# EAGLE board ec3-ps2-100cm2 (EAGLE 7.5.0)
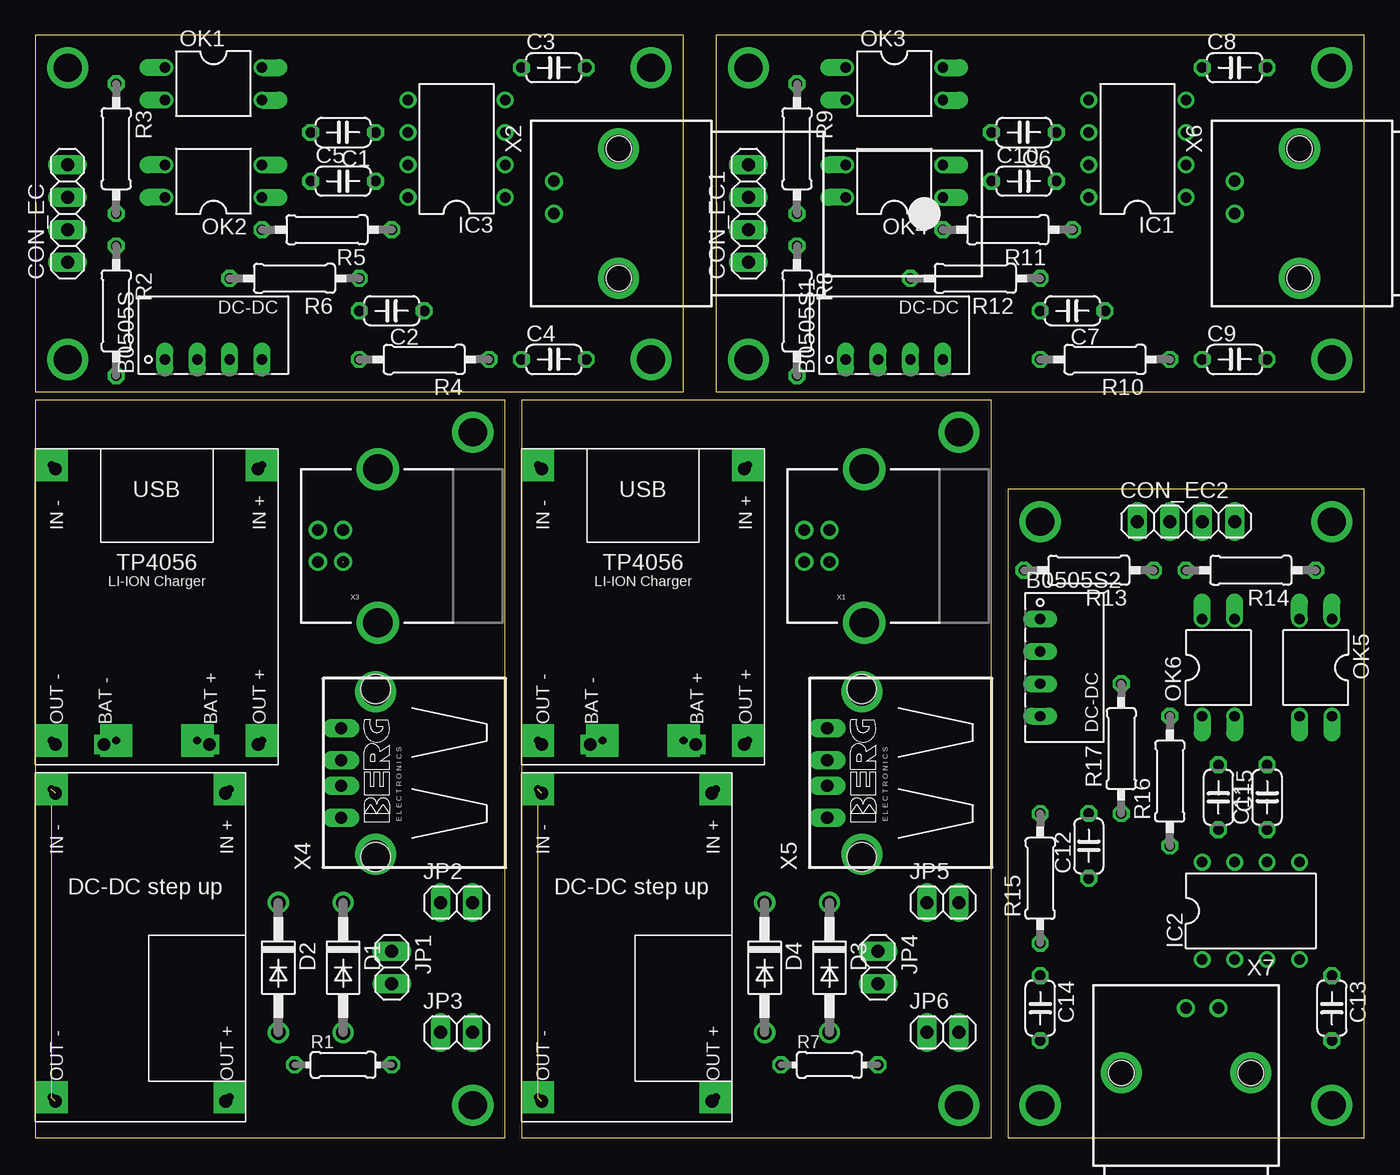
[diagram p0: board, top side]
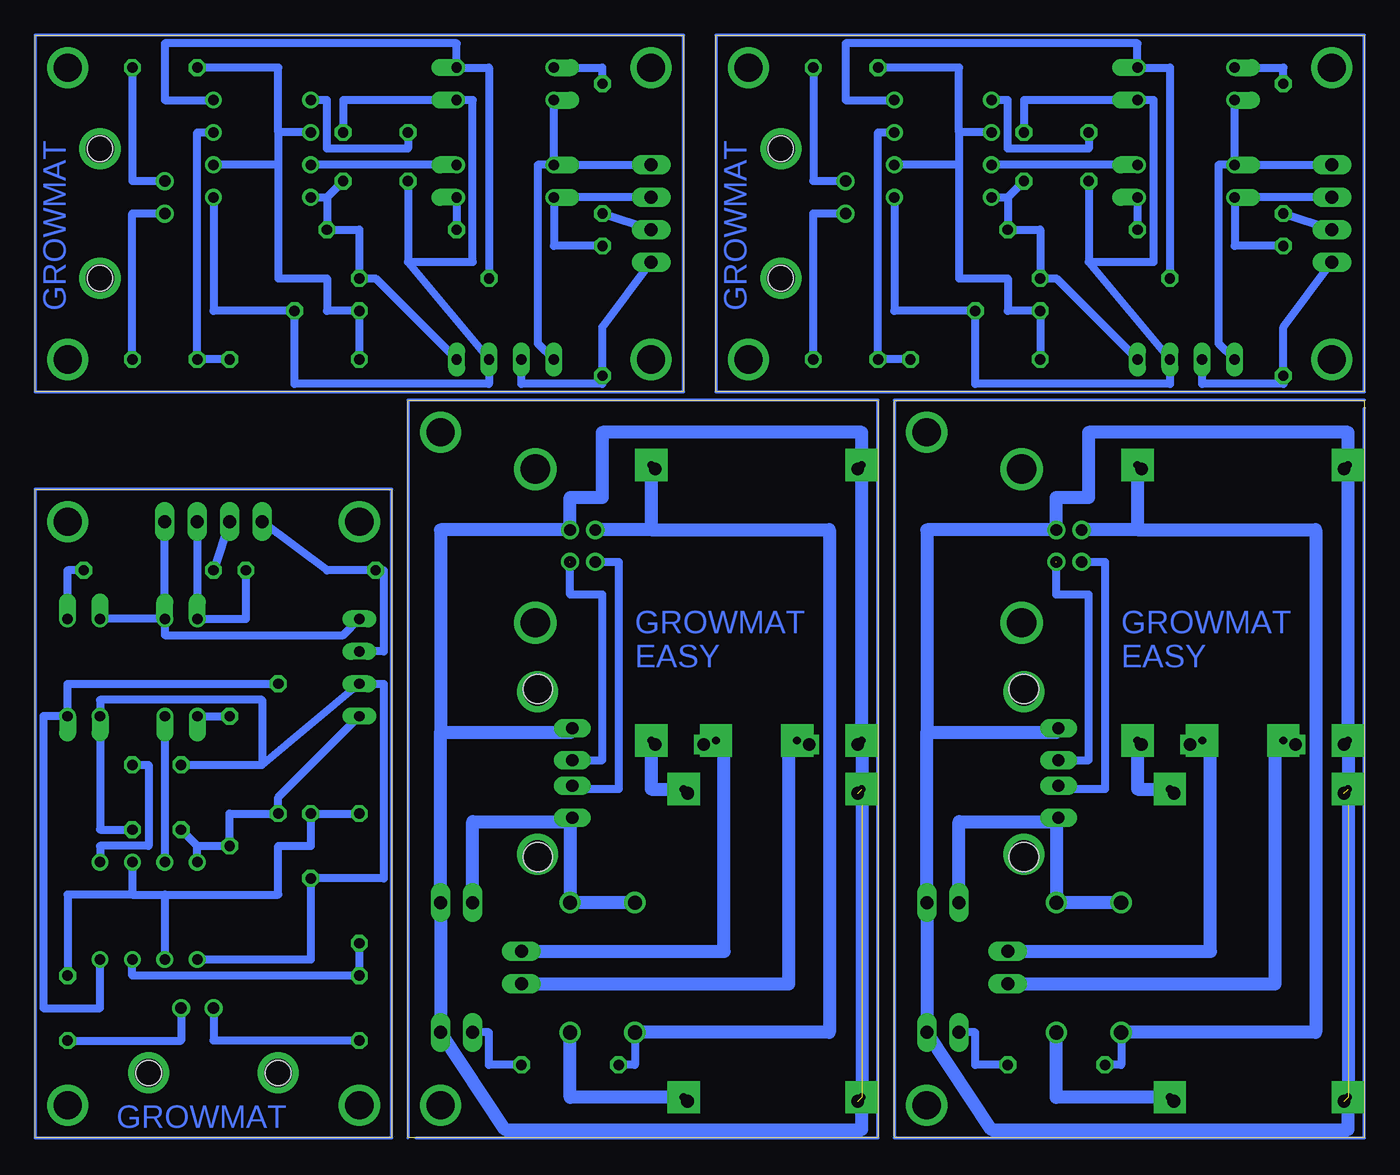
[diagram p1: board, bottom side, seen from below]

Size 104.14 x 86.36 mm. Coordinates in mm from the lower left corner, seen from the top.
Outline: 0,0 36.83,0 36.83,57.77 0,57.77 0,0
Outline: 50.8,58.42 50.8,86.36 0.01,86.36 0.01,58.42 50.8,58.42
Outline: 38.1,0 74.93,0 74.93,57.77 38.1,57.77 38.1,0
Outline: 104.14,58.42 104.14,86.36 53.35,86.36 53.35,58.42 104.14,58.42
Outline: 76.2,0 104.14,0 104.14,50.79 76.2,50.79 76.2,0
Copper layers (1*16): Top 0.035mm / dielectric 1.5mm / Bottom 0.035mm
Design rules "default": minimum track width 10mil, minimum drill 24mil, track to track 8mil, track to pad 8mil, pad to pad 8mil, via to via 8mil, smd to smd 8mil, copper to edge 40mil, drill to drill 8mil, minimum pad ring 10mil, minimum via ring 8mil, stop-mask expansion 4mil, vias tented up to drill 0mil, thermal gap 10mil

## Footprints (pad centres in the part's own frame; a part is rotated, then mirrored left to right if it is on the bottom)
NME = drill 0.813 long: 1 0,3.81; 2 0,1.27; 3 0,-1.27; 4 0,-3.81
C050-024X044 = drill 0.813 octagon: 1 -2.54,0; 2 2.54,0
1X04 = drill 1.016 long: 1 -3.81,0; 2 -1.27,0; 3 1.27,0; 4 3.81,0
DO41-10 = drill 1.118: A 5.08,0; C -5.08,0
DIL08 = drill 0.813 pad 1.27: 1 -3.81,-3.81; 2 -1.27,-3.81; 3 1.27,-3.81; 4 3.81,-3.81; 5 3.81,3.81; 6 1.27,3.81; 7 -1.27,3.81; 8 -3.81,3.81
1X02 = drill 1.016 long: 1 -1.27,0; 2 1.27,0
DIL04 = drill 0.813 offset: 1 -1.27,-3.81; 2 1.27,-3.81; 3 1.27,3.81; 4 -1.27,3.81
0204/7 = drill 0.813 octagon: 1 -3.81,0; 2 3.81,0
0207/10 = drill 0.813 octagon: 1 -5.08,0; 2 5.08,0
TP4056 = drill 1 pad 1.422 square: BAT+ 4.763,-10.477; BAT- -3.493,-10.477; IN+ 8.565,11.105; IN- -7.295,11.105; OUT+ 8.572,-10.477; OUT- -7.303,-10.477
DC-DC_STEPUP = drill 1 pad 1.422 square: IN+ 6.025,11.105; IN- -7.295,11.105; OUT+ 6.032,-13.018; OUT- -7.303,-13.018
USB-B-PTH = drill 0.914: D+ 0,1.25; D- 1.981,1.25; GND 0,-1.25; VBUS 1.981,-1.25 | drill 2.286: P$1 -2.718,-6.02; P$2 -2.718,6.02
AMP_227161 = drill 0.9 pad 1.27: 1 0,-5.08; 2 -2.54,-5.08 | hole 2: -5.08,0; 5.08,0
PN87520 = drill 0.95 long: 1 -3.5,2.71; 2 -1,2.71; 3 1,2.71; 4 3.5,2.71 | hole 2.3: -6.57,0; 6.57,0

## Placement (x,y rotation side)
B0505S  [NME]  13.97,60.96 90 top
B0505S1  [NME]  67.31,60.96 90 top
B0505S2  [NME]  78.74,36.83 0 top
C1  0,1uF  [C050-024X044]  24.13,78.74 180 top
C2  0,1uF  [C050-024X044]  27.94,64.77 180 top
C3  1uF  [C050-024X044]  40.64,83.82 0 top
C4  1uF  [C050-024X044]  40.64,60.96 0 top
C5  0,1uF  [C050-024X044]  24.13,74.93 0 top
C6  0,1uF  [C050-024X044]  77.47,78.74 180 top
C7  0,1uF  [C050-024X044]  81.28,64.77 180 top
C8  1uF  [C050-024X044]  93.98,83.82 0 top
C9  1uF  [C050-024X044]  93.98,60.96 0 top
C10  0,1uF  [C050-024X044]  77.47,74.93 0 top
C11  0,1uF  [C050-024X044]  96.52,26.67 90 top
C12  0,1uF  [C050-024X044]  82.55,22.86 90 top
C13  1uF  [C050-024X044]  101.6,10.16 270 top
C14  1uF  [C050-024X044]  78.74,10.16 270 top
C15  0,1uF  [C050-024X044]  92.71,26.67 270 top
CON_EC  [1X04]  2.54,72.39 90 top
CON_EC1  [1X04]  55.88,72.39 90 top
CON_EC2  [1X04]  90.17,48.26 0 top
D1  1N4004  [DO41-10]  24.13,13.34 270 top
D2  1N4004  [DO41-10]  19.05,13.34 270 top
D3  1N4004  [DO41-10]  62.23,13.34 270 top
D4  1N4004  [DO41-10]  57.15,13.34 270 top
IC1  LM555N  [DIL08]  86.36,77.47 90 top
IC2  LM555N  [DIL08]  95.25,17.78 0 top
IC3  LM555N  [DIL08]  33.02,77.47 90 top
JP1  [1X02]  27.94,13.34 270 top
JP2  [1X02]  33.02,18.41 0 top
JP3  [1X02]  33.02,8.25 0 top
JP4  [1X02]  66.04,13.34 270 top
JP5  [1X02]  71.12,18.41 0 top
JP6  [1X02]  71.12,8.25 0 top
OK1  LTV816  [DIL04]  13.97,82.55 270 top
OK2  LTV816  [DIL04]  13.97,74.93 90 top
OK3  LTV816  [DIL04]  67.31,82.55 270 top
OK4  LTV816  [DIL04]  67.31,74.93 90 top
OK5  LTV816  [DIL04]  100.33,36.83 180 top
OK6  LTV816  [DIL04]  92.71,36.83 0 top
R1  [0204/7]  24.13,5.71 0 top
R2  10k  [0207/10]  6.35,64.77 270 top
R3  1k  [0207/10]  6.35,77.47 270 top
R4  10k  [0207/10]  30.48,60.96 180 top
R5  1k  [0207/10]  22.86,71.12 180 top
R6  10k  [0207/10]  20.32,67.31 180 top
R7  [0204/7]  62.23,5.71 0 top
R8  10k  [0207/10]  59.69,64.77 270 top
R9  1k  [0207/10]  59.69,77.47 270 top
R10  10k  [0207/10]  83.82,60.96 180 top
R11  1k  [0207/10]  76.2,71.12 180 top
R12  10k  [0207/10]  73.66,67.31 180 top
R13  10k  [0207/10]  82.55,44.45 180 top
R14  1k  [0207/10]  95.25,44.45 180 top
R15  10k  [0207/10]  78.74,20.32 90 top
R16  1k  [0207/10]  88.9,27.94 90 top
R17  10k  [0207/10]  85.09,30.48 90 top
U$1  TP4056  [TP4056]  8.89,41.27 0 top
U$2  DC-DC_STEPUP  [DC-DC_STEPUP]  8.89,15.88 0 top
U$3  TP4056  [TP4056]  46.99,41.27 0 top
U$4  DC-DC_STEPUP  [DC-DC_STEPUP]  46.99,15.88 0 top
X1  USBPTH  [USB-B-PTH]  62.23,46.35 180 top
X2  1-227161-0  [AMP_227161]  45.72,72.39 270 top
X3  USBPTH  [USB-B-PTH]  24.13,46.35 180 top
X4  [PN87520]  26.67,28.57 90 top
X5  [PN87520]  64.77,28.57 90 top
X6  1-227161-0  [AMP_227161]  99.06,72.39 270 top
X7  1-227161-0  [AMP_227161]  90.17,5.08 180 top

## Library data of the parts
B0505S B0505S1 B0505S2 = dc-dc-converter; MF: C & D TECHNOLOGIES, INC; MPN: NME1205D; OC_FARNELL: 1021466; OC_NEWARK: 98B8198
C1-C15 = rcl
CON_EC CON_EC1 CON_EC2 JP1-JP6 = pinhead
D1-D4 = diode
IC1-IC3 = linear
OK1-OK6 = optocoupler; OC_FARNELL: unknown; OC_NEWARK: unknown
R1 R7 = resistor
R2-R6 R8-R17 = eagle-ltspice; SPICEMODEL: NONE; SPICEPREFIX: R
U$1 U$3 = TP4056 charging module with protection
U$2 U$4 = DC-DC step up
X1 X3 = usb
X2 X6 X7 = con-coax; MF: TYCO ELECTRONICS; MPN: 1-227161; OC_FARNELL: unknown; OC_NEWARK: 33B3200
X4 X5 = con-berg; OC_FARNELL: unknown; OC_NEWARK: unknown

## Nets
5V: B0505S.2 CON_EC.1 R2.2
5V1: B0505S1.2 CON_EC1.1 R8.2
5V2: B0505S2.2 CON_EC2.1 R13.2
EC: CON_EC.3 OK2.4 R2.1
EC1: CON_EC1.3 OK4.4 R8.1
EC2: CON_EC2.3 OK6.4 R13.1
EC_5V: B0505S.4 C5.2 IC3.8 R5.1 R6.1
EC_5V1: B0505S1.4 C10.2 IC1.8 R11.1 R12.1
EC_5V2: B0505S2.4 C15.2 IC2.8 R16.1 R17.1
EC_EANBLE: CON_EC.2 R3.2
EC_EANBLE1: CON_EC1.2 R9.2
EC_EANBLE2: CON_EC2.2 R14.2
EC_EC: IC3.7 OK2.2
EC_EC1: IC1.7 OK4.2
EC_EC2: IC2.7 OK6.2
EC_EC_ENABLE: IC3.4 OK1.4 R6.2
EC_EC_ENABLE1: IC1.4 OK3.4 R12.2
EC_EC_ENABLE2: IC2.4 OK5.4 R17.2
EC_GND: B0505S.3 C1.1 C2.1 C5.1 IC3.1 OK1.3
EC_GND1: B0505S1.3 C6.1 C7.1 C10.1 IC1.1 OK3.3
EC_GND2: B0505S2.3 C11.1 C12.1 C15.1 IC2.1 OK5.3
GND: B0505S.1 CON_EC.4 OK1.2 OK2.3
GND1: B0505S1.1 CON_EC1.4 OK3.2 OK4.3
GND2: B0505S2.1 CON_EC2.4 OK5.2 OK6.3
N$1: D2.A R1.1 U$1.IN+ X3.VBUS
N$2: U$1.OUT+ U$2.IN+
N$3: JP2.2 JP3.2 U$1.IN- U$1.OUT- U$2.IN- U$2.OUT- X3.GND X4.4
N$6: JP1.1 U$1.BAT+
N$7: JP1.2 U$1.BAT-
N$8: D1.A U$2.OUT+
N$9: D1.C D2.C JP2.1 X4.1
N$10: C1.2 IC3.5
N$11: D4.A R7.1 U$3.IN+ X1.VBUS
N$12: JP3.1 R1.2
N$13: X3.D+ X4.3
N$14: X3.D- X4.2
N$15: U$3.OUT+ U$4.IN+
N$16: JP4.1 U$3.BAT+
N$17: JP4.2 U$3.BAT-
N$18: D3.A U$4.OUT+
N$19: D3.C D4.C JP5.1 X5.1
N$20: JP6.1 R7.2
N$21: X1.D+ X5.3
N$22: X1.D- X5.2
N$23: JP5.2 JP6.2 U$3.IN- U$3.OUT- U$4.IN- U$4.OUT- X1.GND X5.4
N$26: OK3.1 R9.1
N$27: C6.2 IC1.5
N$28: C7.2 C8.1 IC1.2 IC1.6 R10.2
N$29: C3.2 X2.2
N$30: C2.2 C3.1 IC3.2 IC3.6 R4.2
N$31: OK1.1 R3.1
N$32: C4.1 IC3.3 R4.1
N$33: OK2.1 R5.2
N$34: C4.2 X2.1
N$35: C9.1 IC1.3 R10.1
N$36: OK4.1 R11.2
N$37: C8.2 X6.2
N$38: C9.2 X6.1
N$39: OK5.1 R14.1
N$40: C11.2 IC2.5
N$41: C12.2 C13.1 IC2.2 IC2.6 R15.2
N$42: C14.1 IC2.3 R15.1
N$43: OK6.1 R16.2
N$44: C13.2 X7.2
N$45: C14.2 X7.1

## Tracks (layer width: path | path; a pad name or v marks a point on that pad's centre or on a via)
5V
  Bottom 0.61: B0505S.2 12.7,59.05 6.35,59.05 R2.2 6.35,63.5 CON_EC.1
5V1
  Bottom 0.61: B0505S1.2 66.04,59.05 59.69,59.05 R8.2 59.69,63.5 CON_EC1.1
5V2
  Bottom 0.61: B0505S2.2 76.83,38.1 76.83,44.45 R13.2 81.28,44.45 CON_EC2.1
EC
  Bottom 0.61: R2.1 10.16,69.85 OK2.4 CON_EC.3
EC1
  Bottom 0.61: R8.1 63.5,69.85 OK4.4 CON_EC1.3
EC2
  Bottom 0.61: R13.1 87.63,40.64 OK6.4 CON_EC2.3
EC_5V
  Bottom 0.61: 27.94,73.66 R5.1 25.4,71.12 R6.1 24.13,67.31 B0505S.4 | IC3.8 27.94,73.66 | 27.94,73.66 C5.2
EC_5V1
  Bottom 0.61: 81.28,73.66 R11.1 78.74,71.12 R12.1 77.47,67.31 B0505S1.4 | IC1.8 81.28,73.66 | 81.28,73.66 C10.2
EC_5V2
  Bottom 0.61: 91.44,22.86 R16.1 88.9,25.4 R17.1 85.09,26.67 B0505S2.4 | IC2.8 91.44,22.86 | 91.44,22.86 C15.2
EC_EANBLE
  Bottom 0.61: CON_EC.2 R3.2
EC_EANBLE1
  Bottom 0.61: CON_EC1.2 R9.2
EC_EANBLE2
  Bottom 0.61: CON_EC2.2 R14.2
EC_EC
  Bottom 0.61: OK2.2 IC3.7
EC_EC1
  Bottom 0.61: OK4.2 IC1.7
EC_EC2
  Bottom 0.61: OK6.2 IC2.7
EC_EC_ENABLE
  Bottom 0.61: R6.2 15.24,83.82 OK1.4 17.78,85.73 40.64,85.73 40.64,81.28 IC3.4
EC_EC_ENABLE1
  Bottom 0.61: R12.2 68.58,83.82 OK3.4 71.12,85.73 93.98,85.73 93.98,81.28 IC1.4
EC_EC_ENABLE2
  Bottom 0.61: R17.2 101.6,35.56 OK5.4 103.5,33.02 103.5,10.16 99.06,10.16 IC2.4
EC_GND
  Bottom 0.61: C1.1 26.67,81.28 OK1.3 16.51,81.28 16.51,68.58 21.59,68.58 | 21.59,68.58 B0505S.3 15.24,59.05 30.48,59.05 C2.1 36.83,64.77 IC3.1 | C5.1 21.59,68.58
EC_GND1
  Bottom 0.61: C6.1 80.01,81.28 OK3.3 69.85,81.28 69.85,68.58 74.93,68.58 | 74.93,68.58 B0505S1.3 68.58,59.05 83.82,59.05 C7.1 90.17,64.77 IC1.1 | C10.1 74.93,68.58
EC_GND2
  Bottom 0.61: C11.1 99.06,24.13 OK5.3 99.06,34.29 86.36,34.29 86.36,29.21 | 86.36,29.21 B0505S2.3 76.83,35.56 76.83,20.32 C12.1 82.55,13.97 IC2.1 | C15.1 86.36,29.21
GND
  Bottom 0.61: B0505S.1 11.43,62.23 11.43,76.2 OK2.3 | OK2.3 OK1.2 | OK2.3 CON_EC.4
GND1
  Bottom 0.61: B0505S1.1 64.77,62.23 64.77,76.2 OK4.3 | OK4.3 OK3.2 | OK4.3 CON_EC1.4
GND2
  Bottom 0.61: B0505S2.1 80.01,39.37 93.98,39.37 OK6.3 | OK6.3 OK5.2 | OK6.3 CON_EC2.4
N$1
  Bottom 0.254: 21.59,47.62 X3.VBUS | 17.78,47.62 U$1.IN+
  Bottom 0.61: D2.A 19.05,5.71 R1.1
  Bottom 1.016: 17.78,47.62 3.81,47.62 3.81,8.25 D2.A | 17.78,52.07 17.78,47.62 | 17.78,47.62 21.59,47.62
N$2
  Bottom 0.254: 15.24,27.3 U$2.IN+ | 17.78,30.48 U$1.OUT+
  Bottom 1.016: 15.24,27.3 17.78,27.3 17.78,30.48
N$3  (2 unrouted)
  Bottom 0.254: 1.27,26.67 U$2.IN- | 1.27,31.11 U$1.OUT- | 1.27,52.7 U$1.IN- | 24.13,31.75 X4.4
  Bottom 1.016: 34.29,31.75 24.13,31.75 | 34.29,31.75 34.29,47.6 X3.GND 24.13,50.16 21.59,50.16 21.59,55.24 1.27,55.24 1.27,52.7 1.27,31.11 | U$1.OUT- 1.27,30.8 1.27,27.3 | 1.27,3.17 1.27,0.64 29.21,0.64 JP3.2 JP2.2 34.29,31.75
  Bottom 1.27: 1.27,26.67 1.59,26.67
N$4  (via drill 0.6 pad 2.54)  (1 unrouted)
  Bottom 1.016: v1.27,27.3 v1.27,3.17
  other vias: 15.24,3.17 1.27,31.11 6.35,31.11 17.78,31.11 12.7,31.11 15.24,27.3 17.78,52.7 1.27,52.7
N$5  (via drill 2.2)
  other vias: 34.29,55.24 34.29,2.54 26.67,34.92 26.67,22.22
N$6
  Bottom 0.254: 12.06,30.48 U$1.BAT+
  Bottom 1.016: 12.06,30.48 12.06,14.61 JP1.1
N$7
  Bottom 0.254: 6.98,30.48 U$1.BAT-
  Bottom 1.016: 6.98,30.48 6.98,12.07 JP1.2
N$8
  Bottom 0.254: 15.24,3.17 U$2.OUT+
  Bottom 1.016: 15.24,3.17 24.13,3.17 D1.A
N$9
  Bottom 1.016: D2.C D1.C 24.13,25.07 X4.1 23.96,24.77 31.75,24.77 JP2.1
N$10
  Bottom 0.61: IC3.5 27.94,81.28 27.94,77.47 21.59,77.47 C1.2
N$11
  Bottom 0.254: 59.69,47.62 X1.VBUS | 55.88,47.62 U$3.IN+
  Bottom 0.61: D4.A 57.15,5.71 R7.1
  Bottom 1.016: 55.88,47.62 41.91,47.62 41.91,8.25 D4.A | 55.88,52.07 55.88,47.62 | 55.88,47.62 59.69,47.62
N$12
  Bottom 0.61: R1.2 30.48,5.71 30.48,8.25 JP3.1
N$13  (1 unrouted)
  Bottom 0.61: X4.3 21.59,29.57 21.59,42.55 24.13,42.55 24.13,45.09
N$14
  Bottom 0.61: X3.D- 20.32,45.1 20.32,27.3 23.96,27.3 X4.2
N$15
  Bottom 0.254: 53.34,27.3 U$4.IN+ | 55.88,30.48 U$3.OUT+
  Bottom 1.016: 53.34,27.3 55.88,27.3 55.88,30.48
N$16
  Bottom 0.254: 50.17,30.48 U$3.BAT+
  Bottom 1.016: 50.17,30.48 50.17,14.61 JP4.1
N$17
  Bottom 0.254: 45.09,30.48 U$3.BAT-
  Bottom 1.016: 45.09,30.48 45.09,12.07 JP4.2
N$18
  Bottom 0.254: 53.34,3.17 U$4.OUT+
  Bottom 1.016: 53.34,3.17 62.23,3.17 D3.A
N$19
  Bottom 1.016: D4.C D3.C 62.23,25.07 X5.1 62.06,24.77 69.85,24.77 JP5.1
N$20
  Bottom 0.61: R7.2 68.58,5.71 68.58,8.25 JP6.1
N$21  (1 unrouted)
  Bottom 0.61: X5.3 59.69,29.57 59.69,42.55 62.23,42.55 62.23,45.09
N$22
  Bottom 0.61: X1.D- 58.42,45.1 58.42,27.3 62.06,27.3 X5.2
N$23  (2 unrouted)
  Bottom 0.254: 39.37,26.67 U$4.IN- | 39.37,31.11 U$3.OUT- | 39.37,52.7 U$3.IN- | 62.23,31.75 X5.4
  Bottom 1.016: 72.39,31.75 62.23,31.75 | 72.39,31.75 72.39,47.6 X1.GND 62.23,50.16 59.69,50.16 59.69,55.24 39.37,55.24 39.37,52.7 39.37,31.11 | U$3.OUT- 39.37,30.8 39.37,27.3 | 39.37,3.17 39.37,0.64 67.31,0.64 JP6.2 JP5.2 72.39,31.75
  Bottom 1.27: 39.37,26.67 39.69,26.67
N$24  (via drill 0.6 pad 2.54)  (1 unrouted)
  Bottom 1.016: v39.37,27.3 v39.37,3.17
  other vias: 53.34,3.17 39.37,31.11 44.45,31.11 55.88,31.11 50.8,31.11 53.34,27.3 55.88,52.7 39.37,52.7
N$25  (via drill 2.2)
  other vias: 72.39,55.24 72.39,2.54 64.77,34.92 64.77,22.22
N$26
  Bottom 0.61: OK3.1 59.69,83.82 R9.1
N$27
  Bottom 0.61: IC1.5 81.28,81.28 81.28,77.47 74.93,77.47 C6.2
N$28
  Bottom 0.61: R10.2 C7.2 81.28,64.77 81.28,67.31 85.09,67.31 85.09,76.2 | 85.09,76.2 IC1.2 | IC1.6 85.09,78.74 | C8.1 85.09,83.82 85.09,78.74 | 85.09,78.74 85.09,76.2
N$29
  Bottom 0.61: X2.2 43.18,74.93 C3.2
N$30
  Bottom 0.61: R4.2 C2.2 27.94,64.77 27.94,67.31 31.75,67.31 31.75,76.2 | 31.75,76.2 IC3.2 | IC3.6 31.75,78.74 | C3.1 31.75,83.82 31.75,78.74 | 31.75,78.74 31.75,76.2
N$31
  Bottom 0.61: OK1.1 6.35,83.82 R3.1
N$32
  Bottom 0.61: R4.1 C4.1 38.1,78.74 IC3.3
N$33
  Bottom 0.61: OK2.1 R5.2
N$34
  Bottom 0.61: X2.1 43.18,72.39 C4.2
N$35
  Bottom 0.61: R10.1 C9.1 91.44,78.74 IC1.3
N$36
  Bottom 0.61: OK4.1 R11.2
N$37
  Bottom 0.61: X6.2 96.52,74.93 C8.2
N$38
  Bottom 0.61: X6.1 96.52,72.39 C9.2
N$39
  Bottom 0.61: OK5.1 101.6,44.45 R14.1
N$40
  Bottom 0.61: IC2.5 99.06,22.86 95.25,22.86 95.25,29.21 C11.2
N$41
  Bottom 0.61: R15.2 C12.2 82.55,22.86 85.09,22.86 85.09,19.05 93.98,19.05 | 93.98,19.05 IC2.2 | IC2.6 96.52,19.05 | C13.1 101.6,19.05 96.52,19.05 | 96.52,19.05 93.98,19.05
N$42
  Bottom 0.61: R15.1 C14.1 96.52,12.7 IC2.3
N$43
  Bottom 0.61: OK6.1 R16.2
N$44
  Bottom 0.61: X7.2 92.71,7.62 C13.2
N$45
  Bottom 0.61: X7.1 90.17,7.62 C14.2
S$1  (via drill 2.2)
  other vias: 48.26,83.82 48.26,60.96 2.54,60.96 2.54,83.82 45.72,77.47 45.72,67.31
S$2  (via drill 2.2)
  other vias: 101.6,83.82 101.6,60.96 55.88,60.96 55.88,83.82 99.06,77.47 99.06,67.31
S$3  (via drill 2.2)
  other vias: 101.6,2.54 78.74,2.54 78.74,48.26 101.6,48.26 95.25,5.08 85.09,5.08
S$4
  Bottom 0.254: 0,86.36 50.8,86.36 50.8,58.42 0,58.42 0,86.36
S$5
  Bottom 0.254: 0,57.78 36.83,57.78 36.83,0 0,0 0,57.15
S$6
  Bottom 0.254: 76.2,50.8 104.14,50.8 104.14,0 76.2,0 76.2,50.8
S$7
  Bottom 0.254: 74.3,0 38.1,0 38.1,57.78 74.93,57.78 74.93,0
S$8
  Bottom 0.254: 53.34,86.36 104.14,86.36 104.14,58.42 53.34,58.42 53.34,86.36

## Text on the board
Bottom: GROWMAT | GROWMAT | GROWMAT / EASY | GROWMAT / EASY | GROWMAT